# Altium PCB MasterBoard.PcbDoc
Units mil, origin at the board's own origin, x right, y up, seen from the top; angles counter-clockwise.
Board outline 1955 x 1590 mil, 2 copper layers (Top Layer, Bottom Layer); 67 components, 53 nets, 267 pads, 28 vias.
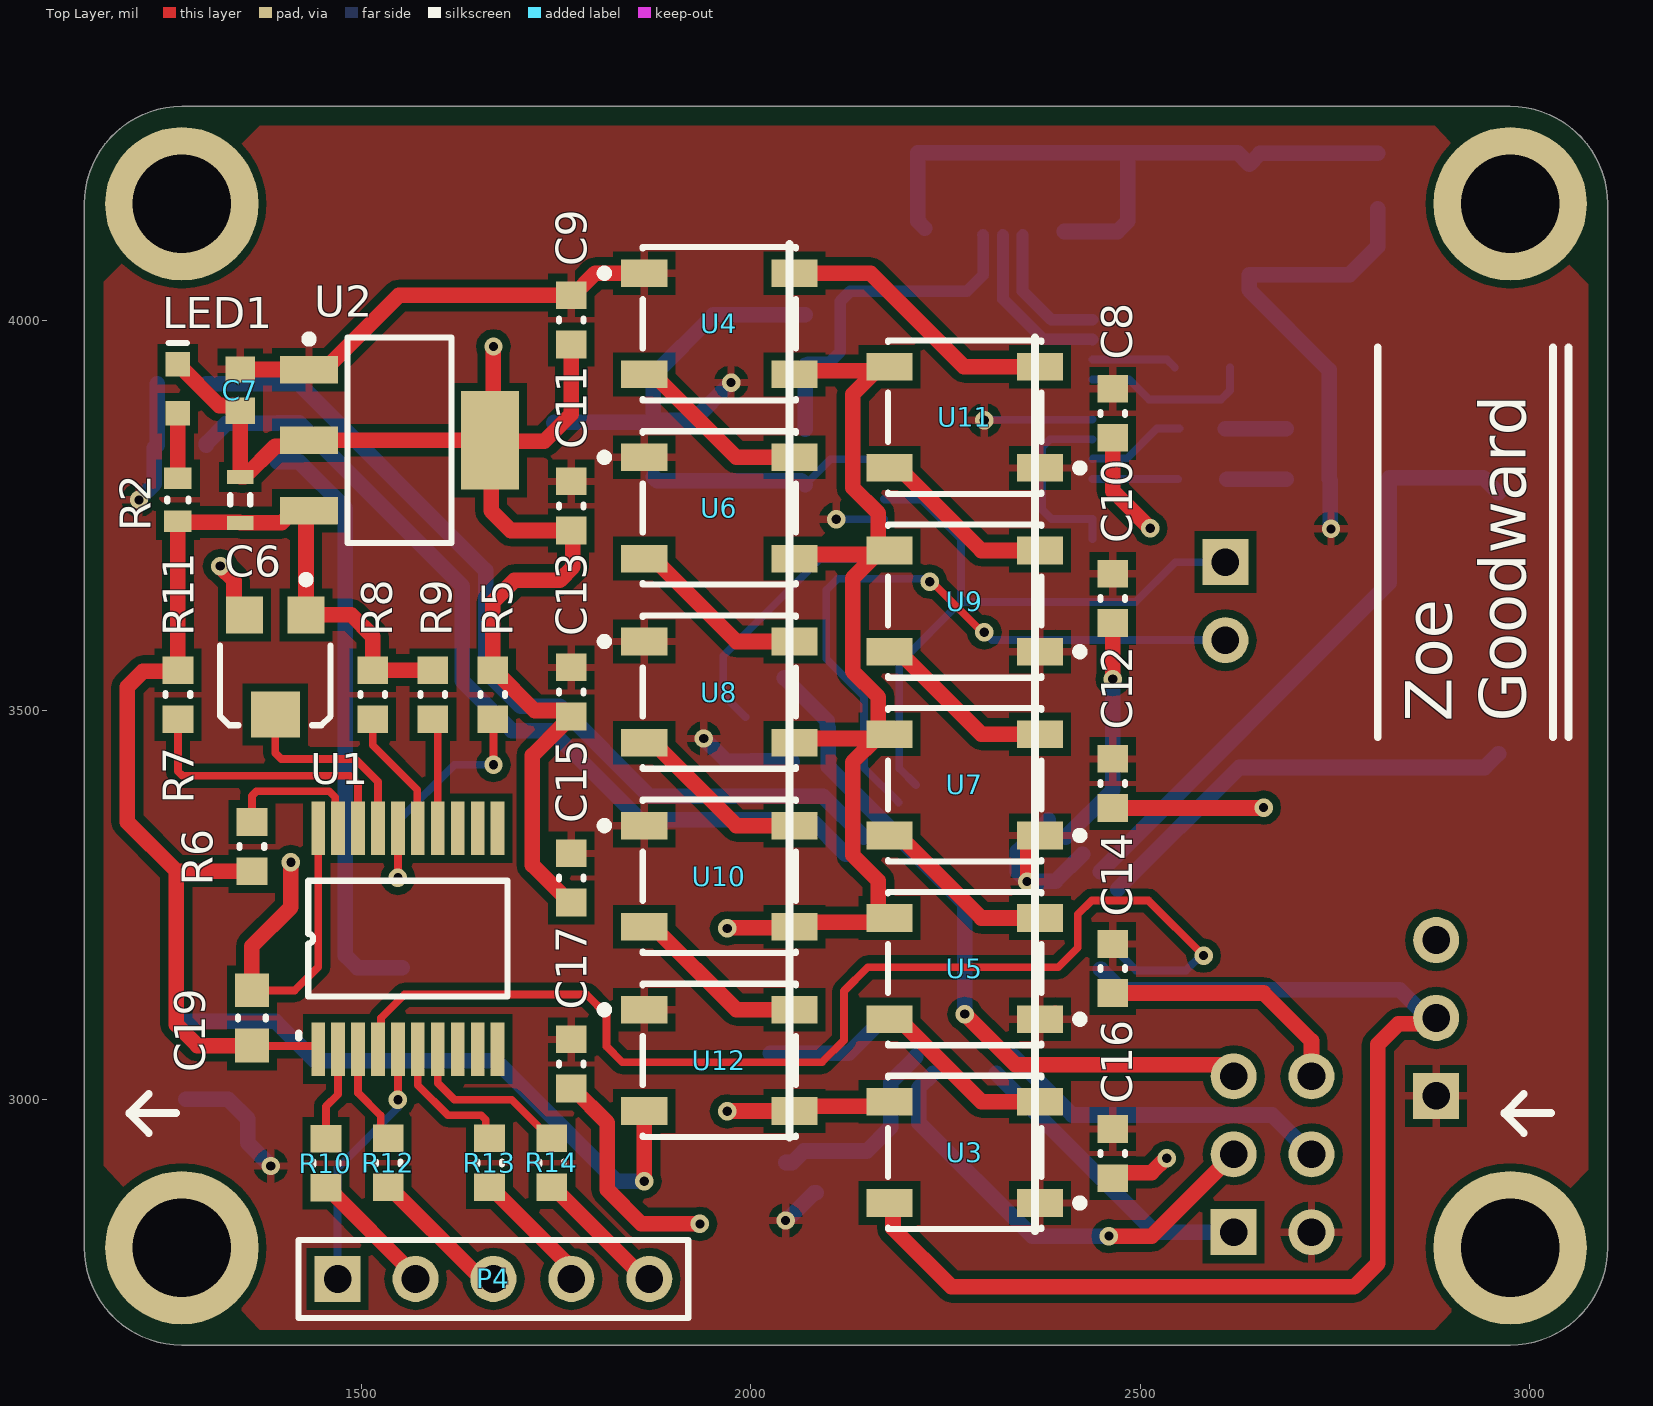
[diagram p0: Top Layer view]
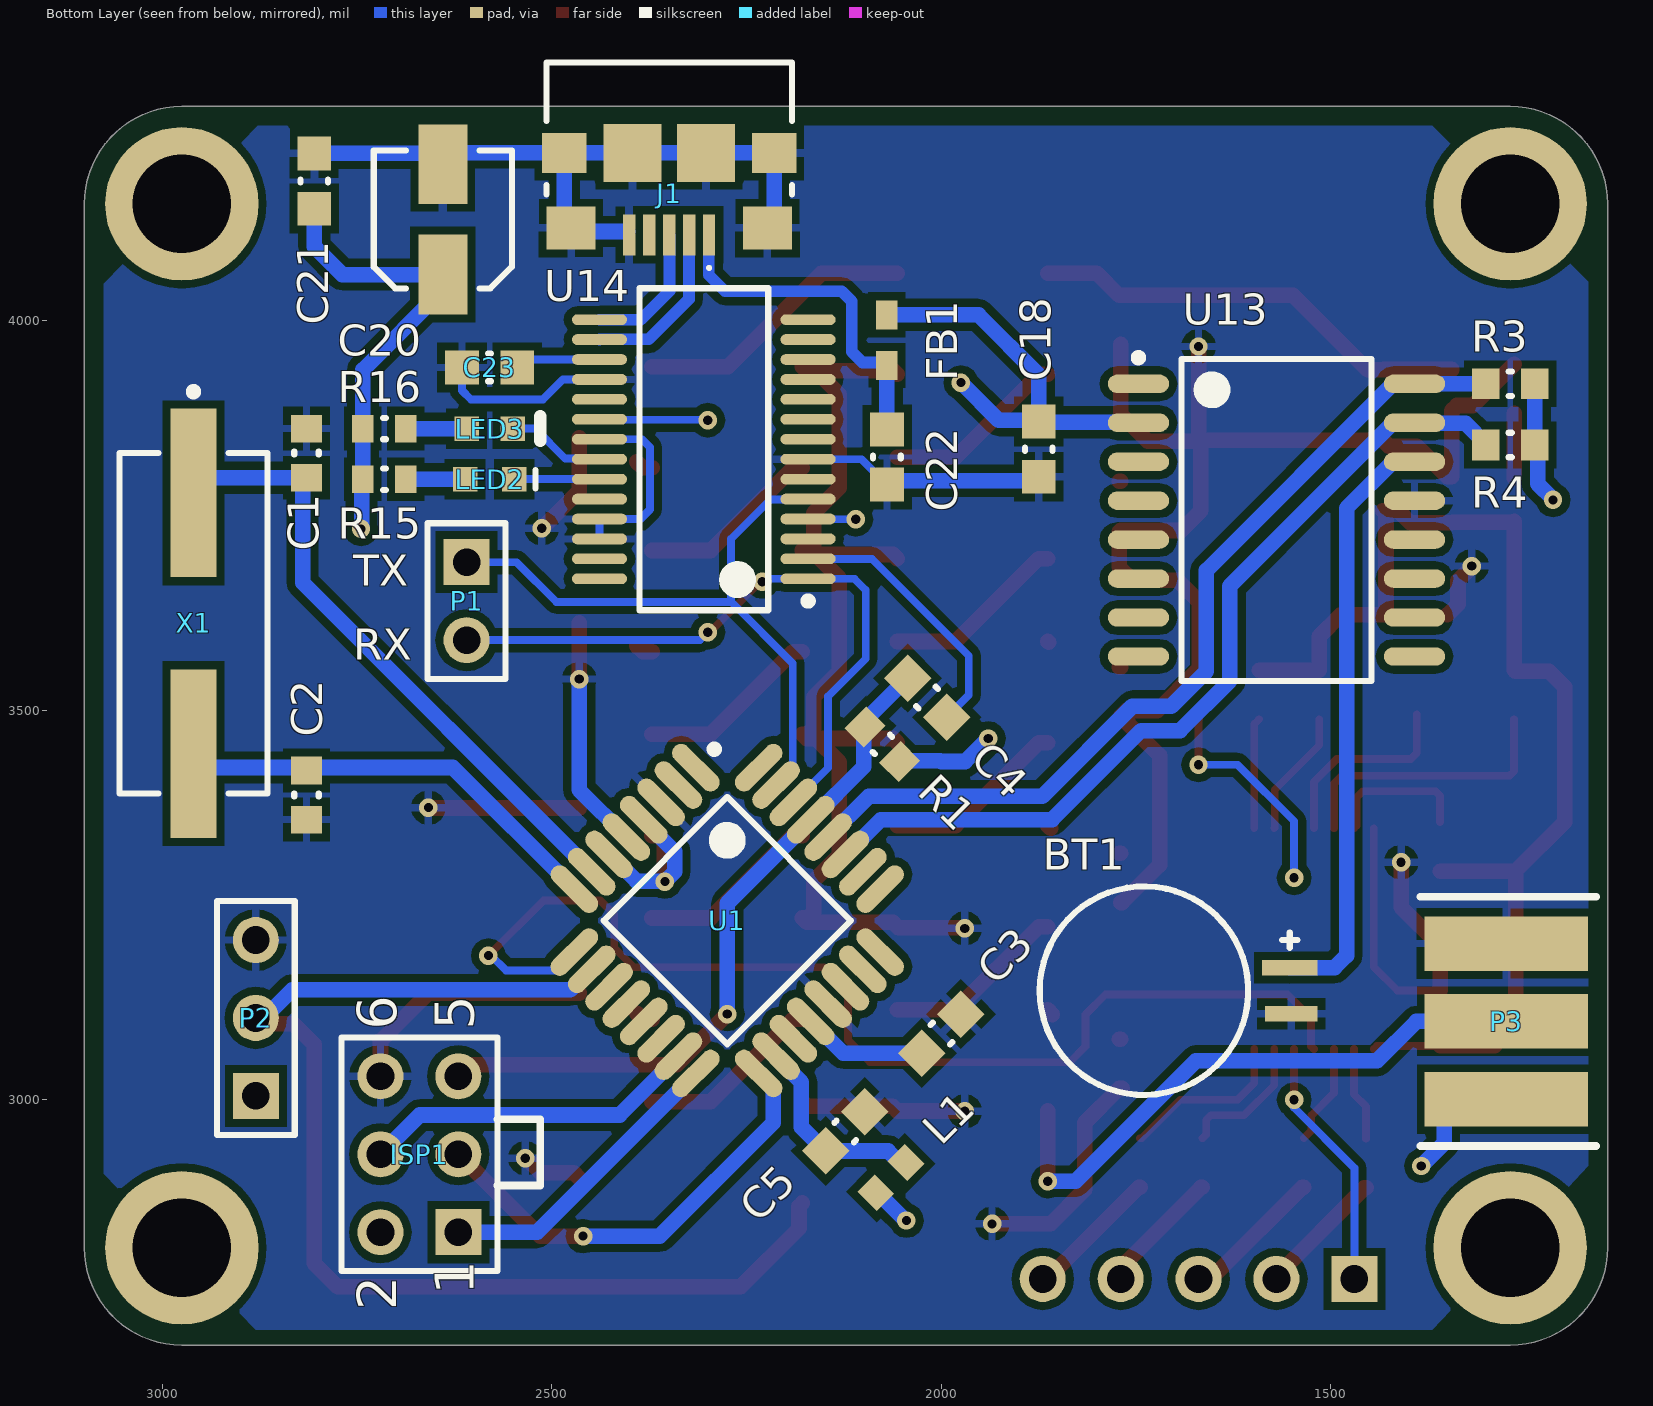
[diagram p1: Bottom Layer view, seen from below]

## Layer stack, top to bottom
Top Solder: solder mask 0.4, Solder Resist, Dk 3.5
Top Layer: signal copper 1.4
Dielectric 1: dielectric 12.6, FR-4, Dk 4.8
Bottom Layer: signal copper 1.4
Bottom Solder: solder mask 0.4, Solder Resist, Dk 3.5

## Board outline
1145,2810 1145,4150 cw(c1270,4150) 1270,4275 2975,4275 cw(c2975,4150) 3100,4150 3100,2810 cw(c2975,2810) 2975,2685 1270,2685 cw(c1270,2810)

## Design rules (kind name [scope] priority, off if disabled: settings)
Clearance [All] p1: gap=10 ignorepadtopadclearanceinfootprint=FALSE except(0: Arc-Hole Track-Hole SMDPad-Hole THPad-Hole Via-Hole Fill-Hole Poly-Hole Region-Hole Text-Hole; 6: SMDPad-SMDPad; 8: Arc-SMDPad Track-SMDPad)
DiffPairsRouting "Schematic Differential Pairs Routing_1" [InNet('USB_P')] p1: maxlimit=10 minlimit=10 mostfreqgap=10 toplayer_minwidth=15 toplayer_maxwidth=15 toplayer_prefwidth=15 bottomlayer_minwidth=15 bottomlayer_maxwidth=15 bottomlayer_prefwidth=15 maxuncoupledlength=500
DiffPairsRouting "Schematic Differential Pairs Routing" [InNet('USB_N')] p2: maxlimit=10 minlimit=10 mostfreqgap=10 toplayer_minwidth=15 toplayer_maxwidth=15 toplayer_prefwidth=15 bottomlayer_minwidth=15 bottomlayer_maxwidth=15 bottomlayer_prefwidth=15 maxuncoupledlength=500
DiffPairsRouting [All] p3: maxlimit=10 minlimit=10 mostfreqgap=10 toplayer_minwidth=15 toplayer_maxwidth=15 toplayer_prefwidth=15 bottomlayer_minwidth=15 bottomlayer_maxwidth=15 bottomlayer_prefwidth=15 maxuncoupledlength=500
PolygonConnect [All] p1: connectstyle=Relief reliefconductorwidth=10 reliefentries=4 polygonreliefangle="90 Angle" airgapwidth=10
RoutingVias [All] p1: holewidth=11.81 width=23.62 viastyle="Through Hole" minholewidth=11.81 minwidth=23.62 maxholewidth=11.81 maxwidth=23.62
SolderMaskExpansion [All] p1: expansion=4
Width [All] p1: maxlimit=40 minlimit=10 preferedwidth=20 minimp=50.000000 maximp=50.000000 favimp=50.000000
29 further rules are at their usual default settings.

## Classes and differential pairs
differential pair class USB_P: USB
differential pair class USB_N: USB
component class USB: C20 C21 C22 C23 FB1 J1 LED2 LED3 R15 R16 U14
component class Touch: C19 P4 R5 R6 R7 R8 R9 R10 R11 R12 R13 R14
component class RTC: BT1 C18 R3 R4 U13
component class LEDs: C8 C9 C10 C11 C12 C13 C14 C15 C16 C17 P2 P3 U3 U4 U5 U6 U7 U8 U9 U10 U11 U12
component class Control: C1 C2 C3 C4 C5 C6 C7 ISP1 L1 LED1 P1 R1 R2 U1 U2 X1
differential pair USB: +USB_P -USB_N

## Components (designator, comment, footprint, x,y, rotation, side; value= is the part's Value field where it differs from the comment)
BT1 "MS621FE-FL11E" SEIK-MS621FE-FL11E-2_V 1740,3140 r180 bottom
C1 "CAP 22pF 16V" CAPC0603(1608)100_N 2815,3830 r270 bottom value=22pF
C2 "CAP 22pF 16V" CAPC0603(1608)100_N 2815,3391.14 r270 bottom value=22pF
C3 "100nF" CAPC0603(1608)100_M 2000,3085 r315 bottom
C4 "100nF" CAPC0603(1608)100_M 2018.43,3516.26 r45 bottom
C5 "100nF" CAPC0603(1608)100_M 2123.43,2959.35 r315 bottom
C6 "CAP CER 1µF" CAPC1608X90X20LL10 1345,3770 r270 top
C7 "CAP CER 4.7µF" CAPC1608X90X35NL10T15 1345,3910.94 r90 top
C8 "100nF 16V" CAPC0603(1608)100_N 2465,3880.98 r90 top value=100nF
C9 "100nF 16V" CAPC0603(1608)100_N 1770,4000.94 r90 top value=100nF
C10 "100nF 16V" CAPC0603(1608)100_N 2465,3643.48 r90 top value=100nF
C11 "100nF 16V" CAPC0603(1608)100_N 1770,3762.19 r90 top value=100nF
C12 "100nF 16V" CAPC0603(1608)100_N 2465,3405.98 r90 top value=100nF
C13 "100nF 16V" CAPC0603(1608)100_N 1770,3523.44 r90 top value=100nF
C14 "100nF 16V" CAPC0603(1608)100_N 2465,3168.48 r90 top value=100nF
C15 "100nF 16V" CAPC0603(1608)100_N 1770,3284.69 r90 top value=100nF
C16 "100nF 16V" CAPC0603(1608)100_N 2465,2930.98 r90 top value=100nF
C17 "100nF 16V" CAPC0603(1608)100_N 1770,3045.94 r90 top value=100nF
C18 "100nF" CAPC0603(1608)100_M 1875,3835 r90 bottom
C19 "CAP 100nF" CAPC0603(1608)100_M 1360,3105 r270 top value=100nF
C20 "CAP Alum 4.7µF" NIC-CAPA2-4X5.8_V 2640,4130 r90 bottom
C21 "100nF" CAPC0603(1608)100_M 2805,4179.21 r270 bottom
C22 "CAP 10nF" CAPC0603(1608)100_M 2070,3825 r90 bottom value=10nF
C23 "100nF" CAPC0603(1608)100_M 2580,3940 r180 bottom
FB1 "BLM18PG300SN1D" MURA-BLM18PG_KG-CHIP-2_V1 2070,3975 r270 bottom
ISP1 "Header 3X2" HDR2X3 2620,2830 r90 bottom
J1 "1981568-1" TECO-1981568-5_V 2349.41,4110 r0 bottom
L1 "Inductor" 1608[0603] 2065,2900 r315 bottom value=10µH
LED1 "2V 20mA 0603 Red" 0603_A 1265,3912.48 r270 top
LED2 "TX Red (0603)" 0603_A 2580,3796.5 r0 bottom
LED3 "RX Green (0603)" LITE-ON-LTST-C191KRKT-2_V 2580,3861.5 r180 bottom
P1 "UARTCON" HDR1X2 2609.53,3690 r270 bottom
P2 "Header 3" HDR1X3 2880,3005 r90 bottom
P3 "PIXELS" 328-10-103-40-020001 1275,3100.55 r270 bottom
P4 "Sensors" HDR1X5 1470,2770 r0 top
R1 "10K" RESC0603(1608)_N 2075.93,3456.26 r225 bottom value="10000.00 Ohm"
R2 "68R" RESC0603(1608)_L 1265,3770 r270 top value="68.00 Ohm"
R3 "4K7" RESC0603(1608)_N 1270,3918.99 r0 bottom value="4700.00 Ohm"
R4 "4K7" RESC0603(1608)_N 1270,3840.43 r180 bottom value="4700.00 Ohm"
R5 "Jumper 0603" RESC0603(1608)_N 1669.02,3520 r90 top value="0.00 Ohm"
R6 "10K" RESC0603(1608)_N 1360,3325 r270 top value="10000.00 Ohm"
R7 "10K" RESC0603(1608)_N 1265,3520 r90 top value="10000.00 Ohm"
R8 "10K" RESC0603(1608)_N 1515,3520 r90 top value="10000.00 Ohm"
R9 "10K" RESC0603(1608)_N 1592.24,3520 r90 top value="10000.00 Ohm"
R10 "4K7" RESC0603(1608)_N 1455,2918.5 r90 top value="4700.00 Ohm"
R11 "TC33X-2-103E" BOUR-TC33X-2_V 1390,3551.5 r270 top
R12 "4K7" RESC0603(1608)_N 1535,2919.02 r90 top value="4700.00 Ohm"
R13 "4K7" RESC0603(1608)_N 1665,2919.02 r90 top value="4700.00 Ohm"
R14 "4K7" RESC0603(1608)_N 1745,2919.02 r90 top value="4700.00 Ohm"
R15 "150R" RESC0603(1608)_L 2715,3796.5 r0 bottom value="150.00 Ohm"
R16 "150R" RESC0603(1608)_L 2715,3861.5 r0 bottom value="150.00 Ohm"
U1 "MTCH108" "MTCH-108 SSOP" 1545,3210 r90 top (schematic designator U*1)
U1 "ATmega328P-AU" 32A_M 2274.92,3230 r225 bottom
U2 "MCP1825ST-3302E/DB" SOT-223-DB3_L 1549.45,3846.5 r0 top
U3 "1655" ADA-RGB-1655_V 2275,2932.44 r180 top
U4 "1655" ADA-RGB-1655_V 1960,3995.94 r0 top
U5 "1655" ADA-RGB-1655_V 2275,3168.32 r180 top
U6 "1655" ADA-RGB-1655_V 1960,3759.6 r0 top
U7 "1655" ADA-RGB-1655_V 2275,3404.19 r180 top
U8 "1655" ADA-RGB-1655_V 1960,3523.25 r0 top
U9 "1655" ADA-RGB-1655_V 2275,3640.07 r180 top
U10 "1655" ADA-RGB-1655_V 1960,3286.9 r0 top
U11 "1655" ADA-RGB-1655_V 2275,3875.94 r180 top
U12 "1655" ADA-RGB-1655_V 1960,3050.55 r0 top
U13 "DS3231SN" W16-H2_L 1570,3743.99 r180 bottom
U14 "FT232RL-Reel" SSOP-28_L 2305,3835 r0 bottom
X1 "ATS16ASM-1" CTS-ATS-SM-XTAL-2 2960,3611.61 r270 bottom

## Footprints (in the part's own frame and the unit in brackets; to place one, negate y for a bottom-side part, rotate by r counter-clockwise, add the part's x,y. Pads: shape width x height; smd on the part's side, far side on the other; paste and mask are expansions set on the pad)
32A_M [mm] "Thin QFP, 32-Leads, Body 7x7mm, Pitch 0.8mm, IPC Low Density"
  oval 1.95x0.6 smd: 1(-4.25,2.8) 2(-4.25,2) 3(-4.25,1.2) 4(-4.25,0.4) 5(-4.25,-0.4) 6(-4.25,-1.2) 7(-4.25,-2) 8(-4.25,-2.8) 17(4.25,-2.8) 18(4.25,-2) 19(4.25,-1.2) 20(4.25,-0.4) 21(4.25,0.4) 22(4.25,1.2) 23(4.25,2) 24(4.25,2.8)
  oval 0.6x1.95 smd: 9(-2.8,-4.25) 10(-2,-4.25) 11(-1.2,-4.25) 12(-0.4,-4.25) 13(0.4,-4.25) 14(1.2,-4.25) 15(2,-4.25) 16(2.8,-4.25) 25(2.8,4.25) 26(2,4.25) 27(1.2,4.25) 28(0.4,4.25) 29(-0.4,4.25) 30(-1.2,4.25) 31(-2,4.25) 32(-2.8,4.25)
  silkscreen extent -4.37,-2.85 2.85,3.77, body extent -3.5,-3.5 3.5,3.5, height 1.2
328-10-103-40-020001 [mil]
  rect 70x210 smd: 1(-100,0) 2(0,0) 3(100,0)
  silkscreen extent -160,-110 160,115, body extent -145,-115 145,225, height 83
0603_A [mm] "Chip LED, 2-Leads, Body 1.6x0.8mm, IPC Medium Density"
  rect 0.8x0.8 smd: 1(-0.8,0) 2(0.8,0)
  silkscreen extent -1.5,-0.3 -1.5,0.3, body extent -0.8,-0.4 0.8,0.4, height 0.7
1608[0603] [mm] "Chip Capacitor, Body 1.6x0.8mm, IPC High Density"
  rect 0.8x0.9 smd: 1(-0.7,0) 2(0.7,0)
  body extent -0.87,-0.47 0.87,0.47, height 1.3
ADA-RGB-1655_V [mm] "SMD, 4-Leads, Body 5x5mm"
  rect 1.5x0.9 smd: 1(-2.45,1.65) 2(-2.45,-1.65) 3(2.45,-1.65) 4(2.45,1.65)
  silkscreen extent -3.88,-2.5 2.5,2.5, body extent -2.7,-2.5 2.7,2.5, height 1.68
BOUR-TC33X-2_V [mm] "SMD, 3-Leads, Body 3.8x3.6mm"
  rect 1.2x1.2 smd: 1(-1.8,1) 3(-1.8,-1)
  rect 1.5x1.6 smd: 2(1.45,0)
  silkscreen extent -3.07,-1.8 1.8,1.8, body extent -2,-1.8 1.96,1.8, height 1.15
CAPC0603(1608)100_M [mm] "Chip Capacitor, Body 1.6x0.8mm, Height 1.0mm, IPC Low Density"
  rect 1.1x1.1 smd: 1(-0.9,0) 2(0.9,0)
  silkscreen extent -0.05,-0.45 0.05,0.45, body extent -0.87,-0.47 0.88,0.48, height 1
CAPC0603(1608)100_N [mm] "Chip Capacitor, Body 1.6x0.8mm, Height 1.0mm, IPC Medium Density"
  rect 0.9x1 smd: 1(-0.8,0) 2(0.8,0)
  silkscreen extent -0.05,-0.4 0.05,0.4, body extent -0.87,-0.48 0.88,0.47, height 1
CAPC1608X90X20LL10 [mm] "Chip Capacitor, 2-Leads, Body 1.70x0.90mm, IPC High Density"
  rect 0.45x0.85 smd: 1(-0.75,0) 2(0.75,0)
  silkscreen extent -0.15,-0.33 0.15,0.33, body extent -0.85,-0.45 0.85,0.45, height 0.9
CAPC1608X90X35NL10T15 [mm] "Chip Capacitor, 2-Leads, Body 1.60x0.80mm, IPC Medium Density"
  rect 0.85x0.95 smd: 1(-0.675,0) 2(0.675,0)
  body extent -0.85,-0.45 0.85,0.45, height 0.9
CTS-ATS-SM-XTAL-2 [mm] "SMD, 2-Leads, Body 11.1x4.83mm, Pitch 8.5mm"
  rect 5.5x1.5 smd: 1(-4.25,0) 2(4.25,0)
  silkscreen extent -7.67,-2.41 5.55,2.41, body extent -5.59,-2.42 5.59,2.42, height 4.3
HDR1X2 [mm] "Connector; Header; 2 Position"
  rect 1.5x1.5 hole 0.9: 1(0,0)
  round 1.5 hole 0.9: 2(2.54,0)
  silkscreen extent -1.27,-1.27 3.81,1.27
HDR1X3 [mm] "Connector; Header; 3 Position"
  rect 1.5x1.5 hole 0.9: 1(0,0)
  round 1.5 hole 0.9: 2(2.54,0) 3(5.08,0)
  silkscreen extent -1.27,-1.27 6.35,1.27
HDR1X5 [mm] "Connector; Header; 5 Position"
  rect 1.5x1.5 hole 0.9: 1(0,0)
  round 1.5 hole 0.9: 2(2.54,0) 3(5.08,0) 4(7.62,0) 5(10.16,0)
  silkscreen extent -1.27,-1.27 11.43,1.27
HDR2X3 [mm] "Connector; Header; 3x2 Position"
  rect 1.5x1.5 hole 0.9: 1(0,0)
  round 1.5 hole 0.9: 2(0,2.54) 3(2.54,0) 4(2.54,2.54) 5(5.08,0) 6(5.08,2.54)
  silkscreen extent -1.27,-1.27 6.35,3.81
LITE-ON-LTST-C191KRKT-2_V [mm] "Chip, 2-Leads, Body 1.6x0.8mm"
  rect 0.8x0.8 smd: 1(-0.75,0) 2(0.75,0)
  silkscreen extent 1.65,-0.4 1.65,0.4, body extent -0.8,-0.4 0.8,0.4, height 0.55
"MTCH-108 SSOP" [mm]
  rect 1.75x0.45 smd: 1(-3.683,2.54) 2(-3.683,1.89) 3(-3.683,1.24) 4(-3.683,0.59) 5(-3.683,-0.06) 6(-3.683,-0.71) 7(-3.683,-1.36) 8(-3.683,-2.01) 9(-3.683,-2.66) 10(-3.683,-3.31) 11(3.517,-3.31) 12(3.517,-2.66) 13(3.517,-2.01) 14(3.517,-1.36) 15(3.517,-0.71) 16(3.517,-0.06) 17(3.517,0.59) 18(3.517,1.24) 19(3.517,1.89) 20(3.517,2.54)
  silkscreen extent -3.3,-3.64 1.81,3.17, body extent -2.73,-3.98 2.57,3.22, height 2
MURA-BLM18PG_KG-CHIP-2_V1 [mm] "Chip Ferrite Bead, 2-Leads, Body 1.6x0.8mm, Height 0.95mm, Flow, 0.5 to 1.5A Rated Current"
  rect 0.95x0.7 smd: 1(-0.825,0) 2(0.825,0)
  body extent -0.8,-0.4 0.8,0.4, height 0.95
NIC-CAPA2-4X5.8_V [mm] "Aluminum Electrolytic Capacitor, Diameter 4mm, Height 6.1mm, Pitch 3.6mm"
  rect 2.6x1.6 smd: 1(-1.8,0) 2(1.8,0)
  silkscreen extent -2.25,-2.25 2.25,2.25, body extent -2,-2 2,2, height 6.1
RESC0603(1608)_L [mm] "Chip Resistor, Body 1.6x0.8mm, IPC High Density"
  rect 0.7x0.9 smd: 1(-0.7,0) 2(0.7,0)
  silkscreen extent -0.05,-0.35 0.05,0.35, body extent -0.85,-0.47 0.85,0.47, height 0.6
RESC0603(1608)_N [mm] "Chip Resistor, Body 1.6x0.8mm, IPC Medium Density"
  rect 0.9x1 smd: 1(-0.8,0) 2(0.8,0)
  silkscreen extent -0.05,-0.4 0.05,0.4, body extent -0.85,-0.47 0.85,0.47, height 0.6
SEIK-MS621FE-FL11E-2_V [mm] "SMD, 2-Leads, Diameter 6.8mm"
  rect 1.8x0.5 smd: 1(4.75,0.75)
  rect 1.7x0.5 smd: 2(4.8,-0.75)
  silkscreen extent -3.4,-3.4 5,3.4, body extent -3.4,-3.4 4.35,3.4, height 2.7
SOT-223-DB3_L [mm] "SOT223, 4-Leads, Body 6.5x3.5mm, Pitch 2.3mm, Lead Span 7mm, IPC High Density"
  rect 1.9x0.9 smd: 1(-2.95,2.3) 2(-2.95,0) 3(-2.95,-2.3)
  rect 1.9x3.2 smd: 4(2.95,0)
  silkscreen extent -3.07,-3.35 1.7,3.42, body extent -1.85,-3.35 1.85,3.35, height 1.8
SSOP-28_L [mm] "SOP, 28-Leads, Body 10.2x5.3mm, Pitch 0.65mm, IPC High Density"
  oval 1.8x0.35 smd: 1(-3.4,4.225) 2(-3.4,3.575) 3(-3.4,2.925) 4(-3.4,2.275) 5(-3.4,1.625) 6(-3.4,0.975) 7(-3.4,0.325) 8(-3.4,-0.325) 9(-3.4,-0.975) 10(-3.4,-1.625) 11(-3.4,-2.275) 12(-3.4,-2.925) 13(-3.4,-3.575) 14(-3.4,-4.225) 15(3.4,-4.225) 16(3.4,-3.575) 17(3.4,-2.925) 18(3.4,-2.275) 19(3.4,-1.625) 20(3.4,-0.975) 21(3.4,-0.325) 22(3.4,0.325) 23(3.4,0.975) 24(3.4,1.625) 25(3.4,2.275) 26(3.4,2.925) 27(3.4,3.575) 28(3.4,4.225)
  silkscreen extent -3.52,-5.25 2.1,5.25, body extent -2.8,-5.25 2.8,5.25, height 2
TECO-1981568-5_V [mm] "SMD, 5-Leads, Body 8x5.9mm, Pitch 0.65mm"
  rect 0.4x1.35 smd: 1(-1.3,0) 2(-0.65,0) 3(0,0) 4(0.65,0) 5(1.3,0)
  rect 1.6x1.4 smd: 6(-3.2,-0.225) 7(3.2,-0.225)
  rect 1.45x1.3 smd: 8(-3.425,-2.675) 9(3.425,-2.675)
  rect 1.9x1.9 smd: 10(-1.2,-2.675) 11(1.2,-2.675)
  silkscreen extent -4,-5.63 4,1.12, body extent -4,-5.63 4,0.28, height 3
W16-H2_L [mm] "SOIC, 16-Leads, Body 10.3x7.5mm, Pitch 1.27mm, IPC High Density"
  oval 2x0.6 smd: 1(-4.5,4.445) 2(-4.5,3.175) 3(-4.5,1.905) 4(-4.5,0.635) 5(-4.5,-0.635) 6(-4.5,-1.905) 7(-4.5,-3.175) 8(-4.5,-4.445) 9(4.5,-4.445) 10(4.5,-3.175) 11(4.5,-1.905) 12(4.5,-0.635) 13(4.5,0.635) 14(4.5,1.905) 15(4.5,3.175) 16(4.5,4.445)
  silkscreen extent -4.62,-5.25 3.1,5.42, body extent -3.8,-5.25 3.8,5.25, height 2.65

## Part data
BT1: library part CMP-2000-05342-1, "MS Lihium Rechargeable Battery, 3 V, -20 to 60 degC, Tray", Capacity=5.5mAh, Manufacturer=SeikoInstruments, Output Voltage=3V, Battery Size=621, Brand=SeikoInstrumentsMicroEnergy, Chemistry=Lithium, Datasheet URL=http://datasheet.octopart.com/MS621FE-FL11E-Seiko-datasheet-5320152.pdf, Datasheet Version=Jan-08, Diameter=6.8mm, Factory Pack Quantity=100, Height=2.1mm, Manufacturer URL=http://www.sii.co.jp/en/, Mounting Style=WithLeads, Orientation=Vertical, Packaging=Tray, Product Category=CoinCellBattery, Rechargeable/Non-Rechargeable=Rechargeable, RoHS=NotApplicable, Series=MS, Termination Style=ThroughHole, Type=CoinCellBatterywithLeads, Unit Weight=0.008113oz
C1 C2: library part CMP-1035-00808-1, "CAP 22pF 16V ±5% 0603 (1608 Metric) Thickness 1mm SMD", Case-EIA=0603, Case-Metric=1608, Rated Voltage="16 V", Tolerance=±5%, Max Thickness="1 mm", Technology=SMT
C3 C4 C5 C18 C19 C21 C23: library part CMP-1035-02583-1, "CAP 100nF 16V ±5% 0603 (1608 Metric) Thickness 1mm SMD", Case-EIA=0603, Case-Metric=1608, Rated Voltage="16 V", Tolerance=±5%, Max Thickness="1 mm", Technology=SMT
C6: library part CMP-2000-06025-1, "Chip Capacitor, 1 uF, +/- 10%, 50 V, -55 to 85 degC, 0603 (1608 Metric), RoHS, Tape and Reel / C1608X5R1H105K080AB", Capacitance=1µF, Manufacturer=TDK, Operating Temperature=-55°C~85°C, Package / Case=0603(1608Metric), Package Description="2-Pin Surface Mount Device, Body 1.6 x 0.8 mm", Package Reference=0603, PCN Part Number=MLCCPartNumberChange30/Nov/2012, Ratings=-, Standard Package=1, Temperature Coefficient=X5R, Tolerance=±10%, Voltage - Rated=50V, Applications=GeneralPurpose, Category=Capacitors, Datasheet URL=https://product.tdk.com/info/en/catalog/datasheets/mlcc_commercial_general_en.pdf, Datasheet Version=08/2016, Design Resources=20WNon-IsolatedBuckLEDDriverUsingPLLNK460KG, Family=CeramicCapacitors, Features=-, Height - Seated (Max)=-, Lead Spacing=-, Lead Style=-, Manufacturer URL=http://www.tdk.com/, Mounting Technology=SurfaceMount, Mounting Type=SurfaceMount,MLCC, Online Catalog=CSeries,GeneralPurpose, Other Names=445-7468-6, Packaging=Digi-Reel®, Product Training Modules=CSeriesGeneralApplicationsSEAT,CCV,andTVCLDesignToolsGuidetoReplacinganElectrolyticCapacitorwithanMLCC, RoHS Information=RoHSCertificate-MLCC, Series=C, Size / Dimension="0.063\"Lx0.031\"W(1.60mmx0.80mm)", Thickness (Max)="0.035\"(0.90mm)"
C7: library part CMP-2006-02523-1, "GRM188R61E475KE11D", Manufacturer=Murata, Part Number=GRM188R61E475KE11D
C8 C9 C10 C11 C12 C13 C14 C15 C16 C17: library part CMP-1035-02584-1, "CAP 100nF 16V ±10% 0603 (1608 Metric) Thickness 1mm SMD", Case-EIA=0603, Case-Metric=1608, Rated Voltage="16 V", Tolerance=±10%, Max Thickness="1 mm", Technology=SMT
C20: library part CMP-0687-00013-1, "Aluminum Electrolytic Capacitor, UD Series, Low Impedance, 4.7 uF, 35 V, + / - 20%, -55 to 105 degC, Chip Type, 4 x 5.8 mm D x L, Pb-Free, Reel / UUD1V4R7MCL1GS", Manufacturer=Nichicon, PartNumber=UUD1V4R7MCL1GS, Rated Capacitance="4.7 uF", Rated Ripple Current (at 100kHz)="80 mA", Rated Voltage="35 V", Tolerance Rated Capacitance="-20 to 20%", ComponentLink1Description="Manufacturer URL", ComponentLink1URL=http://www.nichicon.co.jp/, ComponentLink2Description=Datasheet, ComponentLink2URL=http://products.nichicon.co.jp/en/pdf/XJA043/e-ud.pdf, ComponentLink3Description="Package Specification", ComponentLink3URL=http://products.nichicon.co.jp/en/pdf/XJA043/e-ud.pdf, DatasheetVersion=08/2012, Diameter="4 mm", Endurance Time="2000 h", Impedance="1.8 Ohm", Length="5.8 mm", Mounting Technology="Surface Mount", PackageDescription="2-Pin Surface Mount Device, Diameter 4 mm, Height 5.8 mm, Pitch 3.6 mm", PackageReference=CAPAE-D4H5.8, Packing="Dia382mm Reel", RoHS=TRUE
C22: library part CMP-1035-02306-1, "CAP 10nF 10V ±10% 0603 (1608 Metric) Thickness 1mm SMD", Case-EIA=0603, Case-Metric=1608, Rated Voltage="10 V", Tolerance=±10%, Max Thickness="1 mm", Technology=SMT
FB1: library part CMP-0686-00572-2, "Chip Ferrite Bead for Power Lines, 30 Ohm, 1000 mA, -55 to 125 degC, 1.6 x 0.8 x 0.95 mm SMD, Tape and Reel", DC Resistance="0.05 Ohm Max.", Manufacturer=Murata, Operating Temperature Range="-55 to 125 degC", Rated Current="1000 mA", ComponentLink1Description="Manufacturer URL", ComponentLink1URL=http://www.murata.com/, ComponentLink2Description=Datasheet, ComponentLink2URL=http://www.murata.com/products/catalog/pdf/c31e.pdf, ComponentLink3Description="Package Specification", ComponentLink3URL=http://www.murata.com/products/catalog/pdf/c31e.pdf, DatasheetVersion=08/2013, Impedance (at 100 MHz)="30 Ohm Typ.", Mounting Technology="Surface Mount", PackageDescription="2-Pin Chip, Body 1.6 x 0.8 mm", PackageReference=BLM18_H950-2, Packing="Tape and Reel", PartNumber=BLM18PG300SN1D
ISP1: "Header, 3-Pin, Dual row", LatestRevisionDate=17-Jul-2002, LatestRevisionNote="Re-released for DXP Platform.", Publisher="Altium Limited"
J1: library part CMP-2000-05408-1, "Micro USB Receptacle Standard Type B Assy, 5-Pin SMD, RoHS, Tape and Reel", Current Rating (Max)=1/ContactA, Manufacturer="TE Connectivity", Operating Temperature Max Deg. C=85C, Operating Temperature Min Deg. C=-55C, Operating Temp Range=-55Cto85C, Voltage Rating Max=30VAC, Body Orientation=RightAngle, Contact Material=CopperAlloy, Contact Plating=GoldOverNickel, Datasheet URL=http://www.mouser.com/ds/2/418/NG_CD_1981568_E2-621296.pdf, Datasheet Version="Rev. E2, 08/2015", Gender=RCP, Housing Material=Thermoplastic, Manufacturer URL=http://www.te.com/, Mounting Style=SurfaceMount, Number of Contacts=5POS, Number of Ports=1Port, Number of Terminals=5, Packaging=TapeandReel, Pitch (mm)=0.65mm, Product Depth (mm)=5.6mm, Product Height (mm)=3mm, Product Length (mm)=8mm, Termination Method=Solder, Type=MicroUSB
LED1 LED2: library part CMP-1426-00001-1, "SMD mono-color Chip LED, WL-SMCW, Red", Color=Red, Manufacturer="Wuerth Elektronik", PartNumber=150060RS75000, ComponentLink1Description="Manufacturer URL", ComponentLink1URL=http://www.we-online.com, ComponentLink2Description=Datasheet, ComponentLink2URL=http://katalog.we-online.com/led/datasheet/150060RS75000.pdf, PackageReference=0603_A
LED3: library part CMP-2000-05198-1, "Chip LED, Green, 574 nm, 40 pF, -55 to 85 degC, 2-Pin SMD, RoHS, Tape and Reel", Emitting Color=YellowGreen, Forward Current=30mA, Forward Voltage=2.4V, Manufacturer=Lite-On, Operating Temperature Classification=Industrial, Operating Temp Range=-55Cto85C, Package Type=ChipLed, Power Dissipation=75W, Reverse Voltage=5V, Test Current (It)=20mA, Chip Material=AlGaInP, Datasheet URL=http://download.siliconexpert.com/pdfs/2007/08/26/semi_b/manual/lot/ds/ltst-c191kgkt.pdf, Datasheet Version=Jan-07, DELETED=Compliant, Dominant Wave Length=571nm, High Brightness=Yes, Lens Dimensions=1.1X0.8X0.37mm, Luminous Intensity=35mcd, Lum Intensity=35mcd, Main Category=ChipLED, Manufacturer URL=http://www.us.liteon.com/, Mounting=SurfaceMount, Number of Elements=1, Packaging=TapeandReel, Peak Wavelength=574nm, Pin Count=2, Product Depth (mm)=0.8mm, Product Height (mm)=0.55mm, Product Length (mm)=1.6mm, Rad Hardened=No, Shape Type=Rectangular, Type=Uni-Color, Viewing Angle=130deg
P1: library part "Header 2", "Header, 2-Pin", LatestRevisionDate=17-Jul-2002, LatestRevisionNote="Re-released for DXP Platform.", Publisher="Altium Limited"
P2: "Header, 3-Pin", LatestRevisionDate=17-Jul-2002, LatestRevisionNote="Re-released for DXP Platform.", Publisher="Altium Limited"
P3: library part 328-10-103-40-020001
P4: library part "Header 5", "Header, 5-Pin", LatestRevisionDate=17-Jul-2002, LatestRevisionNote="Re-released for DXP Platform.", Publisher="Altium Limited"
R1 R6 R7 R8 R9: library part CMP-1012-00098-1, "10K 0.1W 5% 0603 (1608 Metric)  SMD", Case-EIA=0603, Case-Metric=1608, Power="0.1 W", Tolerance="5 %", Technology=SMT
R2: library part CMP-1012-00046-1, "68R 0.1W 5% 0603 (1608 Metric)  SMD", Case-EIA=0603, Case-Metric=1608, Power="0.1 W", Tolerance="5 %", Technology=SMT
R3 R4 R10 R12 R13 R14: library part CMP-1012-00090-1, "4K7 0.1W 5% 0603 (1608 Metric)  SMD", Case-EIA=0603, Case-Metric=1608, Power="0.1 W", Tolerance="5 %", Technology=SMT
R5: library part CMP-1012-00001-1, "Jumper 0603 (1608 Metric)", Case-EIA=0603, Case-Metric=1608, Power=None, Technology=SMT, Tolerance=None
R11: library part CMP-2100-03695-1, "Trimming Potentiometer, 10000 Ohm, -40 to 100 degC, 3-Pin SMD, RoHS, Tape and Reel", Case/Package=SMD/SMT, Colour=Silver, Manufacturer=Bourns, Max Operating Temperature=100degC, Max Power Dissipation=100mW, Min Operating Temperature=-40degC, Package Description="3-Pin Surface Mount Device, Body 3.8 x 3.6 mm", Package Quantity=2500, Package Reference=TC33X-2, Resistance=10KOhm, Temperature Coefficient=250ppm/degreesC, Tolerance=25%, Voltage Rating (DC)=50V, Composition=Potentiometer, Contact Plating=Silver, Datasheet URL=http://www.bourns.com/docs/Product-Datasheets/TC33.pdf, Datasheet Version=42583.0, Depth=3.8mm, Height=0.047inch, Lead Free=LeadFree, Length=3mm, Manufacturer URL=http://www.bourns.com/, Military Standard=Not, Mount=SurfaceMount, Number of Turns=1, Packaging=TapeandReel, Power Rating=100mW, Radiation Hardening=No, REACH SVHC=NoSVHC, RoHSCompliant=true, Taper=Linear, Termination=FootPrint, Weight=29.4mg, Width=0.118inch
R15 R16: library part CMP-1012-00054-1, "150R 0.1W 5% 0603 (1608 Metric)  SMD", Case-EIA=0603, Case-Metric=1608, Power="0.1 W", Tolerance="5 %", Technology=SMT
U1: library part CMP-0095-00269-2, "8-bit AVR Microcontroller, 32KB Flash, 1KB EEPROM, 2KB SRAM, 32-pin TQFP, Industrial Grade (-40°C to 85°C)", Code_JEDEC=MS-026-ABA, ComponentLink1Description="Manufacturer URL", ComponentLink1URL=http://www.atmel.com/, ComponentLink2Description="ATmega48A/48PA/88A/88PA/168A/168PA/328/328P Datasheet", ComponentLink2URL=http://www.atmel.com/dyn/resources/prod_documents/doc8271.pdf, ComponentLink3Description="ATmega48A/48PA/88A/88PA/168A/168PA/328/328P Summary", ComponentLink3URL=http://www.atmel.com/dyn/resources/prod_documents/8271S.pdf, DatasheetVersion="revD, May-2011", PackageDescription="32-Lead, 7x7x1.0 mm Body, 0.8mm Lead Pitch, Thin Profile Plastic Quad Flat Package (TQFP)", PackageReference=32A, PackageVersion="revC, Oct-2010", RevisionNote="DatasheetVersion & PackageVersion updated. URLs added."
U2: library part CMP-0136-00486-1, "500 mA, Low Voltage, Low Quiescent Current LDO Regulator, 3-Pin SOT-223, Extended Temperature, Tape and Reel", DatasheetVersion="revB, Feb-2008", PackageDescription="3-Lead Plastic Small Outline Transistor (DB) [SOT-223]", PackageReference=SOT-223-DB3, PackageVersion="revBB, Aug-2009"
U3 U4 U5 U6 U7 U8 U9 U10 U11 U12: library part CMP-2000-05026-1, "Intelligent Control LED Integrated Light Source, 3.5 to 5.3 V, -25 to 80 degC, 4-Pin SMD, RoHS, Tape and Reel", Color=Red,Green,Blue(RGB), Manufacturer=Adafruit-Industries-LLC, Package Description="4-Pin Surface Mount Device, Body 5 x 5 mm", Category=Optoelectronics, Configuration=Discrete, Controller Type=-, Datasheet URL=http://datasheet.octopart.com/ADA1655-Adafruit-Industries-datasheet-32028139.pdf, Datasheet Version=May-13, Family=Addressable,Specialty, Interface=-, Manufacturer URL=https://www.adafruit.com/, Mounting Type=SurfaceMount, Number of LEDs=10, Package Reference=1655, Series=Neopixel, Size / Dimension=5.00mmLx5.00mmW, Utilized LED=WS2812(5050)
U13: library part CMP-0254-00293-1, "Extremely Accurate I2C-Integrated Real-Time Clock/TCXO/Crystal, 16-Pin SO, -40 to 85 degC", Code_IPC=SOIC127P1030-16, Code_JEDEC=MS-013-AA, ComponentLink1Description="Manufacturer URL", ComponentLink1URL=http://www.maxim-ic.com, ComponentLink2Description=Datasheet, ComponentLink2URL=http://datasheets.maxim-ic.com/en/ds/DS3231.pdf, ComponentLink3Description="Package Specification", ComponentLink3URL=http://pdfserv.maxim-ic.com/package_dwgs/21-0042.PDF, DatasheetVersion="Rev 8, Jul-2010", PackageDescription="16-Pin Small-Outline IC, Wide (0.3in), 1.27 mm Pitch, SOIC (W)", PackageReference=W16-H2, PackageVersion="revD, 2010"
U14: library part CMP-0078-00029-3, "USB UART Asynchronous Serial Data Transfer Chip, 28-pin SSOP, Tape and Reel", Manufacturer=FTDI, ComponentLink1Description="Manufacturer URL", ComponentLink1URL=http://www.ftdichip.com/, ComponentLink2Description=Datasheet, ComponentLink2URL=http://www.ftdichip.com/Support/Documents/DataSheets/ICs/DS_FT232R.pdf, DatasheetVersion="ver 2.10, Mar-2012", PackageDescription="28-Pin Small Outline Package 0.65 mm Pitch", PackageReference=SSOP-28, PackageVersion=Mar-12, PartNumber=FT232RL-Reel, RevisionNote="DatasheetVersion updated to 2.10 Mar-2012"
X1: library part CMP-0585-00002-2, "ATS-SM Series Quartz Crystal, 16 MHz, -20 to 70 degC, 11.1 x 4.83 x 4.3mm SMD, RoHS, Tape and Reel", Frequency="16 MHz", Manufacturer="CTS Corporation", Operating Temperature="-20 to 70 degC", Shunt Capacitance (C0)="7.0 pF Max", ComponentLink1Description="Manufacturer URL", ComponentLink1URL=http://www.ctscorp.com/, ComponentLink2Description=Datasheet, ComponentLink2URL=http://www.ctscorp.com/components/Datasheets/008-0309-0.pdf, ComponentLink3Description="Package Specification", ComponentLink3URL=http://www.ctscorp.com/components/Datasheets/008-0309-0.pdf, Crystal Cut=AT-Cut, DatasheetVersion="Rev. K", Drive Level (Type)="100 uW", ESR Maximum="40 Ohms", Mounting Technology="Surface Mount", Oscillation Mode="Fundamental or 3rd Overtone", PackageDescription="2-Pin SMD, Body 11.1 x 4.83 mm, Pitch 8.5 mm", PackageReference=ATS-SM-XTAL-2, Packing="Tape and Reel", PartNumber=ATS16ASM-1, RoHS=TRUE
L1: Code_IEC=1005, Code_JEITA=0402, LatestRevisionDate=29-May-2009, LatestRevisionNote="IPC-7351 Footprint Added.", PackageDescription="Chip Inductor", PackageReference=0402-A, Published=8-Jun-2000, Publisher="Altium Limited"
U1: ComponentLink1Description=Datasheet, ComponentLink1URL=http://ww1.microchip.com/downloads/en/DeviceDoc/40001793C.pdf

## Free pads (board coordinates)
  round 196.85 hole 125.98 unplated: M3(1270,2810) M3(1270,4150) M3(2975,2810) M3(2975,4150)

## Via types
v1: diameter 23.62, hole 11.81, Top Layer to Bottom Layer, 28 vias

## Nets (pads, with @x,y where several pads share a name; then routed paths per layer and width w, separated by ;. In a path a pad name is that pad's centre, name@x,y a point inside that pad or via, vN(x,y) a via of type N, cw(c..) or ccw(c..) an arc to the next point about the centre after c; other vN are vias at no path point)
+3V3: C6.2 C19.2 R2.2 R6.2 R7.2 R8.2 R9.2 R11.1 U1.1@1445,3065 U2.3 | length 1544.9
  Top Layer w10: C19.2 1360.71,3068.86 1441.14,3068.86 U1.1@1445,3065
  Top Layer w20: C19.2 1290,3069.57 1262.99,3096.57 1262.99,3293.5 ; R6.2 1262.99,3293.5 ; R9.2 R8.2 1515,3595 1487.64,3622.36 R11.1 1429.37,3752.01 U2.3 1413.62,3755.94 1398.15,3740.47 C6.2 1344.02,3741.46 1265.98,3741.46 R2.2 R7.2 1263.5,3550 1220,3550 1200,3530 1200,3356.5 1262.99,3293.5
+5: C7.2 C8.2 C9.2 C10.2 C11.2 C12.2 C13.2 C14.2 C15.2 C16.2 C17.2 C18.2 C20.1 C21.2 FB1.1 ISP1.2 L1.2 P2.1 P3.3 R1.2 R3.1 R4.2 R15.2 R16.2 U1.4@2382.1,3359.45 U1.6@2426.64,3314.91 U2.1 U3.1 U4.1 U5.1 U6.1 U7.1 U8.1 U9.1 U10.1 U11.1 U12.1 U13.2 U14.4 U14.20 | length 2757.1
  Top Layer w20: C7.2 1345.24,3937.28 1433.07,3937.28 U2.1 1452.99,3937.05 1548.39,4032.44 C9.2 1771.97,4032.44 1800.43,4060.91 U4.1 ; C17.2 C17.2@1771.97,3077.44 ; C15.2 C15.2@1771.97,3316.19 ; C13.2 C13.2@1771.97,3554.94 ; C11.2 C11.2@1771.97,3793.69 ; U12.1@1857.52,3109.49 U12.1 ; U10.1@1859.92,3348.24 U10.1 ; U8.1@1862.32,3586.99 U8.1 ; v1(2355,3280) 2355.69,3280.69 2355.69,3331.52 2363.41,3339.23 U7.1 ; U5.1 2383.27,3103.36 U5.1@2390.98,3111.07 ; U9.1 2383.27,3575.11 U9.1@2390.98,3582.82 ; U11.1 2383.27,3810.98 U11.1@2390.98,3818.7
  Bottom Layer w10: v1(2110,3745) 2170.71,3745 U14.4 ; v1(2300,3872.26) 2300.56,3872.82 2438.3,3872.82 U14.20
  Bottom Layer w20: v1(1215,3770) 1215,3770.98 1234.77,3790.75 1234.77,3836.7 R4.2 R3.1 ; P3.3 1329.69,3000.55 1354.69,2975.55 1354.69,2944.56 v1(1384.25,2915) ; U13.2 1747.86,3869.68 1874.25,3869.68 C18.2 ; v1(1940,3463.72) 1969.56,3434.16 2000.12,3434.16 2001.35,3435.38 2052.27,3435.38 R1.2 ; v1(1975,3920.51) 1926.65,3872.17 1876.73,3872.17 C18.2 ; v1(2045,2845) 2045.98,2845 2081.49,2880.51 L1.2 ; FB1.1 1952.48,4007.48 1875,3930 C18.2 ; U1.4@2382.1,3359.45 2382.1,3358.47 2342.49,3318.86 2342.49,3292.51 v1(2355,3280) 2355.69,3280.69 2391.45,3280.69 2425.66,3314.91 U1.6@2426.64,3314.91 ; v1(2745,3732.75) 2744.31,3733.44 2744.31,3794.75 R15.2 R16.2 2742.56,3936.89 2640,4039.45 C20.1 2769.13,4059.13 2805,4095 C21.2
CS0: P4.2 R10.1 | length 165.8
  Top Layer w20: R10.1 1456.97,2887.01 1570,2773.98 P4.2
CS1: P4.3 R12.1 | length 183.7
  Top Layer w20: R12.1 1536.97,2887.52 1647.02,2777.47 1662.53,2777.47 P4.3
CS3: P4.4 R13.1 | length 162.2
  Top Layer w20: R13.1 1666.97,2887.52 1762.53,2791.96 1762.53,2777.47 P4.4
CS4: P4.5 R14.1 | length 173.7
  Top Layer w20: R14.1 1746.97,2887.52 1864.49,2770 P4.5
DTR: C4.1 U14.2 | length 348.2
  Bottom Layer w10: C4.1 1965,3519.58 1965,3570 2089.25,3694.25 U14.2
GND: BT1.2 C1.1 C2.2 C3.1 C5.1 C6.1 C7.1 C8.1 C9.1 C10.1 C11.1 C12.1 C13.1 C14.1 C15.1 C16.1 C17.1 C18.1 C19.1 C20.2 C21.1 C22.1 C23.1 ISP1.6 J1.5 J1.6 J1.7 J1.8 J1.9 J1.10 J1.11 LED1.1 P2.3 P3.1 R5.2 R11.3 U1.3@2359.83,3381.72 U1.5@2404.37,3337.18 U1.20@1445,3348.46 U1.21 U2.2 U2.4 U3.3 U4.3 U5.3 U6.3 U7.3 U8.3 U9.3 U10.3 U11.3 U12.3 U13.13 U14.7 U14.18 U14.21 U14.25 U14.26 | length 6854
  Top Layer w10: C19.1 1415,3140.43 1445,3170.43 U1.20@1445,3348.46
  Top Layer w20: LED1.1 1317.87,3891.1 1338.27,3891.1 C7.1 C6.1 1350.59,3799.53 1389.84,3838.78 1425.59,3838.78 U2.2 U2.4 ; v1(1319.38,3685) 1319.38,3684.02 1337.01,3666.39 1337.01,3635.98 R11.3 ; C19.1 1360,3197.17 1410,3247.17 v1(1410,3304.88) ; v1(1670,3966.87) 1670,3850.9 U2.4 ; C17.1@1768.03,3014.45 C17.1 1771.97,3014.45 1816.02,2970.4 1816.02,2884.63 1859.92,2840.72 v1(1935,2840.72) ; C15.1 1768.03,3253.2 1720,3301.23 1720,3441.95 1760.31,3482.26 1760.31,3484.23 1768.03,3491.95 C13.1 1762.28,3499.67 1722.82,3499.67 1670.98,3551.5 R5.2 1669.02,3639.02 1696.92,3666.92 1755,3666.92 1771.97,3683.89 1771.97,3728.73 C11.1 1692.21,3730.7 1666.97,3755.94 U2.4@1666.97,3845.12 ; C9.1 1770,3880 1735,3845 1667.09,3845 U2.4@1666.97,3845.12 ; v1(1970,2985.16) 1970.43,2985.59 U12.3 2062.36,2991.5 2172.64,2991.5 U3.3 ; v1(1970,3220) 1970.69,3220.69 2055.21,3220.69 U10.3 2062.13,3227.61 2172.87,3227.61 U5.3 2171.8,3233.28 2164.08,3240.99 2164.08,3280.99 2131.02,3314.06 2131.02,3433.44 U7.3@2161.3,3463.72 ; U8.3 2061.89,3463.72 U7.3@2161.3,3463.72 ; U6.3 2061.65,3699.83 U9.3@2161.54,3699.83 ; U4.3 2061.42,3935.94 U11.3@2161.77,3935.94 ; U11.3 2173.58,3935.94 U11.3@2161.77,3935.94 ; C16.1 2472.02,2906.51 2514.69,2906.51 2533.18,2925 v1(2534.16,2925) ; C14.1 2658.52,3136.99 2720,3075.51 ISP1.6 ; C12.1 2658,3374.49 v1(2658.51,3375) ; v1(2465,3540) C10.1 ; C8.1 2465,3781.35 v1(2512.91,3733.44) ; U2.4 U2.4@1666.97,3845.12 ; U7.3@2161.3,3463.72 2173.11,3463.72 U7.3 2171.8,3469.15 2164.08,3476.87 2164.08,3516.87 2131.02,3549.94 2131.02,3669.31 U9.3@2161.54,3699.83 ; U9.3@2161.54,3699.83 2173.35,3699.83 U9.3 2171.8,3705.03 2164.08,3712.75 2164.08,3752.75 2131.02,3785.81 2131.02,3905.19 U11.3@2161.77,3935.94
  Bottom Layer w10: C22.1 2102.64,3822.2 U14.7 ; U14.21@2438.14,3847.07 U14.21 2384.39,3847.8 2374.09,3837.5 2374.09,3757.65 2386.32,3745.43 U14.25 U14.26 ; U14.18 2485.87,3924.57 2511.46,3898.98 2603.98,3898.98 2615.43,3910.43 C23.1
  Bottom Layer w20: C18.1 1880,3794.57 2065,3794.57 C22.1 ; J1.6 2214.57,4127.72 J1.8 J1.10 J1.11 J1.9 ; J1.5@2402.72,4114.43 2470.96,4114.43 J1.7 2484.25,4127.72 J1.9 ; U1.5@2404.37,3337.18 2465,3397.81 v1(2465,3540) ; C21.1 2653.78,4214.65 C20.2 2625.55,4215.31 J1.9
Guard: P4.1 U1.5@1547.36,3065 | length 327
  Top Layer w10: v1(1547.36,3000) U1.5@1547.36,3065
  Bottom Layer w10: P4.1 1470,2912.4 1547.36,2989.76 v1(1547.36,3000)
MCU_MISO: ISP1.1 U1.16@2315.29,3033.74 | length 389.1
  Bottom Layer w20: U1.16@2315.29,3033.74 2519.02,2830 ISP1.1
MCU_MOSI: ISP1.4 U1.15@2337.56,3056.01 | length 434.6
  Bottom Layer w20: U1.15@2337.56,3056.01 2413.09,2980.47 2669.53,2980.47 ISP1.4
MCU_RESET: C4.2 ISP1.5 R1.1 U1.29 | length 905.4
  Top Layer w20: v1(2275,3110) 2340,3045 2605,3045 ISP1.5
  Bottom Layer w20: C4.2 2098.2,3486.6 R1.1 2099.59,3477.14 2099.59,3427.6 U1.29 2275,3252.19 v1(2275,3110)
MCU_RX: P1.2 U1.30 U14.1 | length 861.7
  Top Layer w10: v1(2230,3665) 2232.5,3665 2297.5,3600 v1(2300,3600)
  Bottom Layer w10: U1.30 2145.47,3426.26 2145.47,3517.93 2097.25,3566.16 2097.25,3654.14 2111.77,3668.66 U14.1 2222.65,3668.66 2226.31,3665 v1(2230,3665) ; v1(2300,3600) 2310,3590 P1.2
MCU_SCK: ISP1.3 U1.17@2234.55,3033.74 | length 578.9
  Top Layer w20: v1(2460,2825) 2515,2825 ISP1.3
  Bottom Layer w20: U1.17@2234.55,3033.74 2215.76,3014.94 2215.76,2970.76 2361.53,2825 v1(2460,2825)
MCU_TX: P1.1 U1.31 U14.5 | length 838.2
  Bottom Layer w10: U14.5 2171.86,3770.3 2219.7,3770.3 2270,3720 2270,3639.06 ; U1.31 2190.95,3425.32 2190.95,3560.01 2270,3639.06 ; P1.1 2545.39,3690 2494.46,3639.06 2275,3639.06 2270,3639.06
MTO0: R6.1 U1.19@1470.59,3348.46 | length 187.3
  Top Layer w10: R6.1 1360,3390 1365.91,3395.91 1459.24,3395.91 1466.86,3388.3 1466.86,3352.2 U1.19@1470.59,3348.46
MTO1: R7.1 U1.18@1496.18,3348.46 | length 361.7
  Top Layer w10: R7.1 1265,3421.77 1270.86,3415.91 1485.8,3415.91 1496.18,3405.53 U1.18@1496.18,3348.46
MTO2: R5.1 U1.16@1547.36,3348.46 | length 347.5
  Top Layer w10: v1(1547.36,3285) U1.16@1547.36,3348.46 ; R5.1 1670,3487.52 v1(1670,3430)
  Bottom Layer w10: v1(1547.36,3285) 1547.36,3357.36 1620,3430 v1(1670,3430)
MTO3: R8.1 U1.15@1572.95,3348.46 | length 164
  Top Layer w10: R8.1 1515,3455 1572.09,3397.91 1572.09,3349.33 U1.15@1572.95,3348.46
MTO4: R9.1 U1.14@1598.54,3348.46 | length 142.6
  Top Layer w10: R9.1 1598.54,3482.2 U1.14@1598.54,3348.46
MTPM: U1.4@1521.77,3065 U1.9@2471.18,3189.63 | length 1475.4
  Top Layer w10: U1.4@1521.77,3065 1525.5,3068.73 1525.5,3104.83 1555.67,3135 1789.53,3135 1815,3109.53 1815,3068.51 1835.45,3048.06 2091.57,3048.06 2120,3076.49 2120,3139.53 2150.47,3170 2395,3170 2420,3195 2420,3238 2437.86,3255.86 2510.63,3255.86 v1(2581.49,3185)
  Bottom Layer w10: U1.9@2471.18,3189.63 2494.79,3166.03 2558.84,3166.03 2577.8,3185 v1(2581.49,3185)
MTSA: R11.2 U1.17@1521.77,3348.46 | length 256.2
  Top Layer w10: R11.2 1390,3445 1397.52,3437.48 1492.52,3437.48 1521.77,3408.23 U1.17@1521.77,3348.46
NetBT1_1: BT1.1 U13.14 | length 765.6
  Bottom Layer w20: U13.14 1420.39,3818.99 1480,3759.38 1480,3185 1495.31,3169.69 1552.83,3169.69 BT1.1
NetC3_2: C3.2 U1.20@2167.74,3100.55 | length 159.5
  Bottom Layer w20: C3.2 2126.16,3059.94 2166.76,3100.55 U1.20@2167.74,3100.55
NetC5_2: C5.2 L1.1 U1.18@2212.28,3056.01 | length 257.7
  Bottom Layer w20: L1.1 2053.64,2919.49 2068.45,2934.29 C5.2 2149.29,2934.29 2180,2965 2180,3022.74 2212.28,3055.03 U1.18@2212.28,3056.01
NetC22_2: C22.2 FB1.2 J1.1 | length 448.4
  Bottom Layer w15: FB1.2 2073.69,3946.21 2101.21,3946.21 2115,3960 2115,4025 2127.85,4037.85 2277.85,4037.85 2298.6,4058.6 2298.6,4109.63 J1.1
  Bottom Layer w20: C22.2 FB1.2
NetC23_2: C23.2 U14.17 | length 109.9
  Bottom Layer w10: U14.17 2534.41,3950.16 C23.2
NetLED1_2: LED1.2 R2.1 | length 83.4
  Top Layer w20: R2.1 LED1.2
NetLED2_1: LED2.1 U14.23 | length 109.7
  Bottom Layer w10: U14.23 2548.39,3796.61 LED2.1
NetLED2_2: LED2.2 R15.1 | length 75.9
  Bottom Layer w20: LED2.2 R15.1
NetLED3_1: LED3.1 R16.1 | length 77.9
  Bottom Layer w20: LED3.1 R16.1
NetLED3_2: LED3.2 U14.22 | length 127.9
  Bottom Layer w10: U14.22 2439.58,3822.93 2482.93,3822.93 2521.5,3861.5 LED3.2
NetP3_2: P3.2 U12.2 | length 763.6
  Top Layer w20: v1(1863.54,2895.47) U12.2
  Bottom Layer w20: P3.2 1390.44,3100.55 1440.99,3050 1673.23,3050 1827.76,2895.47 v1(1863.54,2895.47)
NetR10_2: R10.2 U1.2@1470.59,3065 | length 121.5
  Top Layer w10: R10.2 1455,2991.5 1470.59,3007.09 U1.2@1470.59,3065
NetR12_2: R12.2 U1.3@1496.18,3065 | length 130.6
  Top Layer w10: U1.3@1496.18,3065 1496.18,3008.82 1525.34,2979.66 1525.34,2960.17 R12.2
NetR13_2: R13.2 U1.6@1572.95,3065 | length 177.5
  Top Layer w10: U1.6@1572.95,3065 1572.95,3018.76 1611.72,2980 1654.14,2980 1660,2974.14 1660,2955.51 R13.2
NetR14_2: R14.2 U1.7@1598.54,3065 | length 219.4
  Top Layer w10: U1.7@1598.54,3065 1598.54,3021.46 1620,3000 1693.54,3000 1743.03,2950.51 R14.2
NetU3_2: U3.2 U5.4 | length 236.8
  Top Layer w20: U5.4 2190.35,3103.36 2296.31,2997.4 U3.2
NetU4_2: U4.2 U6.4 | length 237
  Top Layer w20: U4.2 1875.35,3930.98 1981.78,3824.56 U6.4
NetU4_4: U4.4 U11.2 | length 364.7
  Top Layer w20: U4.4 2153.96,4060.91 2273.96,3940.91 U11.2
NetU5_2: U5.2 U7.4 | length 236.8
  Top Layer w20: U7.4 2190.35,3339.23 2296.31,3233.28 U5.2
NetU6_2: U6.2 U8.4 | length 237
  Top Layer w20: U6.2 1875.35,3694.64 1981.78,3588.21 U8.4
NetU7_2: U7.2 U9.4 | length 236.8
  Top Layer w20: U9.4 2190.35,3575.11 2296.31,3469.15 U7.2
NetU8_2: U8.2 U10.4 | length 237
  Top Layer w20: U8.2 1875.35,3458.29 1981.78,3351.86 U10.4
NetU9_2: U9.2 U11.4 | length 236.8
  Top Layer w20: U11.4 2190.35,3810.98 2296.31,3705.03 U9.2
NetU10_2: U10.2 U12.4 | length 237
  Top Layer w20: U10.2 1875.35,3221.94 1981.78,3115.51 U12.4
PIXELS: P2.2 U1.10@2448.91,3167.36 U3.4 | length 1527
  Top Layer w20: U3.4 2182.79,2863.24 2182.79,2834.98 2257.76,2760 2775,2760 2805,2790 2805,3071.02 2831.51,3097.53 2872.53,3097.53 P2.2
  Bottom Layer w20: U1.10@2448.91,3167.36 2449.89,3167.36 2476.23,3141.03 2833.4,3141.03 2869.43,3105 P2.2
SCL: R3.2 U1.28 U13.16 | length 1160.8
  Bottom Layer w20: R3.2 U13.16 1420.39,3918.99 1660,3679.38 1660,3550 1705,3505 1755,3505 1870.45,3389.55 2093.1,3389.55 U1.28
SDA: R4.1 U1.27 U13.15 | length 1135.5
  Bottom Layer w20: R4.1 1301.5,3842.4 1327.39,3868.29 1392.14,3868.29 U13.15 1420.39,3868.99 1630,3659.38 1630,3537.57 1693.79,3473.79 1743.79,3473.79 1858.03,3359.55 2077.58,3359.55 2122.22,3314.91 U1.27
USB_N: J1.2 U14.16 | length 218.8
  Bottom Layer w15: J1.2 2324.11,4109.7 2324.11,4027.5 2375.57,3976.04 2438.56,3976.04 U14.16
USB_P: J1.3 U14.15 | length 177.4
  Bottom Layer w15: J1.3 2349.11,4109.7 2349.11,4037.85 2385.93,4001.04 2438.56,4001.04 U14.15
X1_16MHz: C1.2 U1.7@2448.91,3292.64 X1.1 | length 807.7
  Bottom Layer w20: U1.7@2448.91,3292.64 2820,3663.72 2820,3798.5 2940.47,3798.5 X1.1@2960,3778.98
X2_16MHz: C2.1 U1.8@2471.18,3270.37 X1.2 | length 560.9
  Bottom Layer w20: U1.8@2471.18,3270.37 2627.31,3426.5 2815,3426.5 2942.2,3426.5 X1.2
pads on no net: J1.4 U1.1@2315.29,3426.26 U1.2@2337.56,3403.99 U1.8@1624.13,3065 U1.9@1649.72,3065 U1.10@1675.32,3065 U1.11 U1.12 U1.13 U1.14@2359.83,3078.28 U1.19@2190.01,3078.28 U1.22 U1.23 U1.24 U1.25 U1.26 U1.32 U13.1 U13.3 U13.4 U13.5 U13.6 U13.7 U13.8 U13.9 U13.10 U13.11 U13.12 U14.3 U14.6 U14.8 U14.9 U14.10 U14.11 U14.12 U14.13 U14.14 U14.19 U14.24 U14.27 U14.28

## Polygon pours and split planes (outlines as drawn)
+5 on Top Layer "Top Layer-+5" (solid, pour order 0): 1370.07,4250 1170,4050.07 1170,2915 1370.07,2705 2878.06,2705 3075,2910 3075,4046.84 2878.06,4250
GND on Bottom Layer "Bottom Layer-GND" (solid, pour order 2): 1370,4250 1170,4050 1170,2915 1370,2705 2880,2705 3074.99,2905.13 3074.99,4047.45 2877.5,4250

## Silkscreen, mask and mechanical layers (free items; w line width, h text height)
Top Overlay:
  lines w10: 1207.17,2982.83 1202.83,2982.83 ; 1227.5,2957.5 1202.5,2982.5 1202.5,2982.83 ; 1227.5,3007.5 1202.83,2982.83 ; 1262.5,2982.83 1202.5,2982.83 ; 2050,2951.57 2050,4000 2050,4098.43 ; 2365,2831.34 2365,2930 2365,3978.46 ; 2805,3465.45 2805,3965.45 ; 2967.5,2982.5 2992.5,2957.5 ; 2967.5,2982.83 3027.5,2982.83 ; 2967.83,2982.83 2992.5,3007.5 ; 3030,3465.45 3030,3965.45 ; 3050,3465.45 3050,3965.45 ; 1202.5,2982.83 1202.83,2982.83
  text "Zoe" at 2900,3485.45 h60 r90
  text "Goodward" at 2995,3485.45 h60 r90
Bottom Overlay:
  lines w10: 2570,2890 2515,2890 2515,2975 2570,2975
  text "TX" at 2755,3660 h40
  text "RX" at 2755,3565 h40
BoardOutline:
  the board outline again, w10

## Dimensions
2975,2685 to 2975,4275 on Mechanical 15
1145,4150 to 3100,4150 on Mechanical 15

## Text inside footprints (layer, text, board x,y; h text height)
FB1: Mechanical 6 "Land Pattern Adapted for Flow Soldering" at 2046.38,4014.37 h1.97 r90
ISP1: Bottom Overlay "1" at 2600,2750 h50 r270; Bottom Overlay "2" at 2700,2730 h50 r270; Bottom Overlay "5" at 2600,3090 h50 r270; Bottom Overlay "6" at 2700,3090 h50 r270